# Altium PCB ATGuard Simple V52.PcbDoc
Units mm, origin at the board's own origin, x right, y up, seen from the top; angles counter-clockwise.
Board outline 99.5 x 18.8 mm, 2 copper layers (Top Layer, Bottom Layer), stack 1.071 mm thick; 87 components, 49 nets, 274 pads, 88 vias.
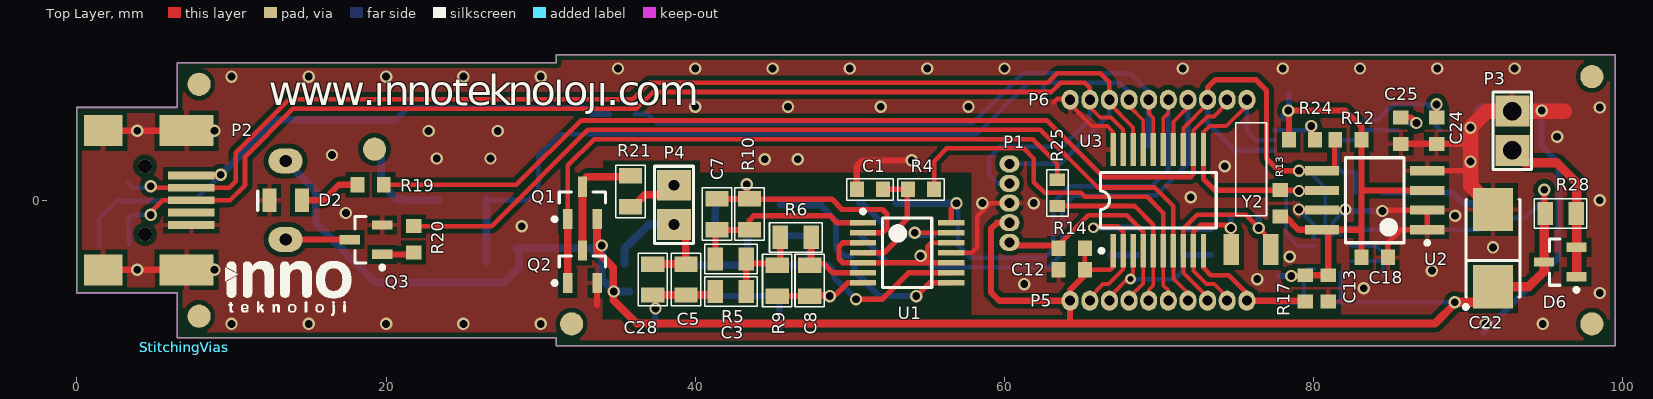
[diagram p0: Top Layer view]
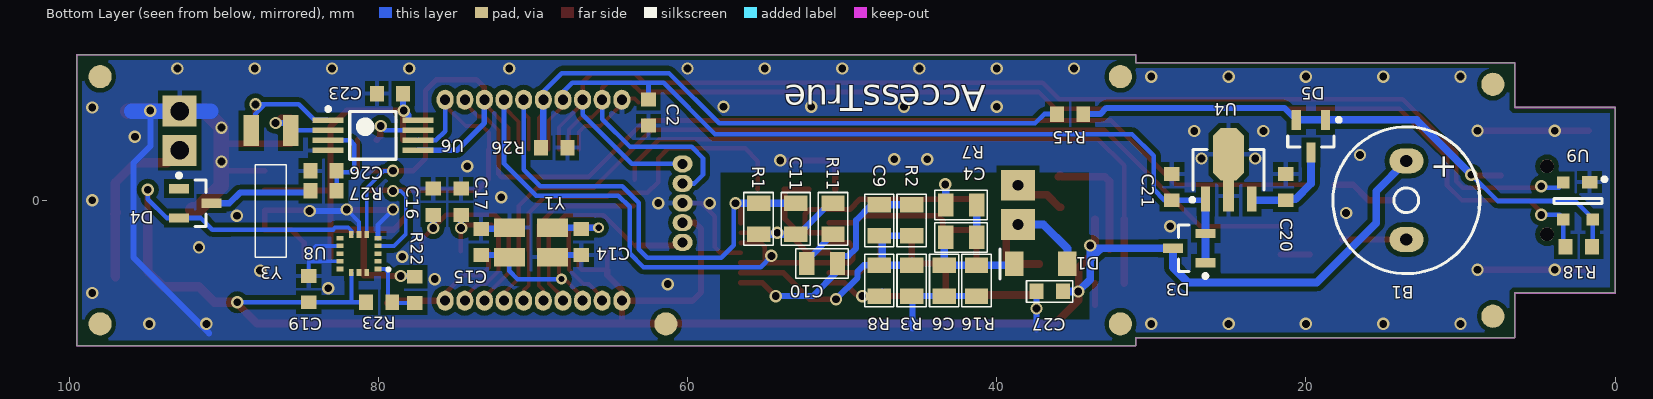
[diagram p1: Bottom Layer view, seen from below]
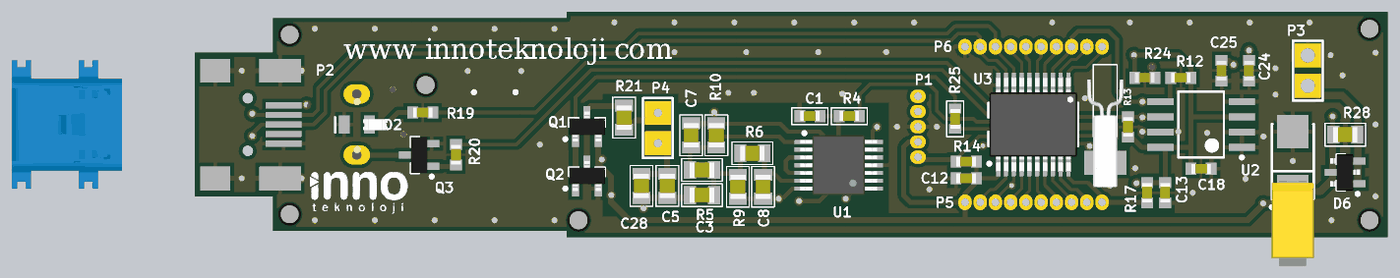
[diagram p2: 3D render of the assembled board from above, using the file's embedded part models]
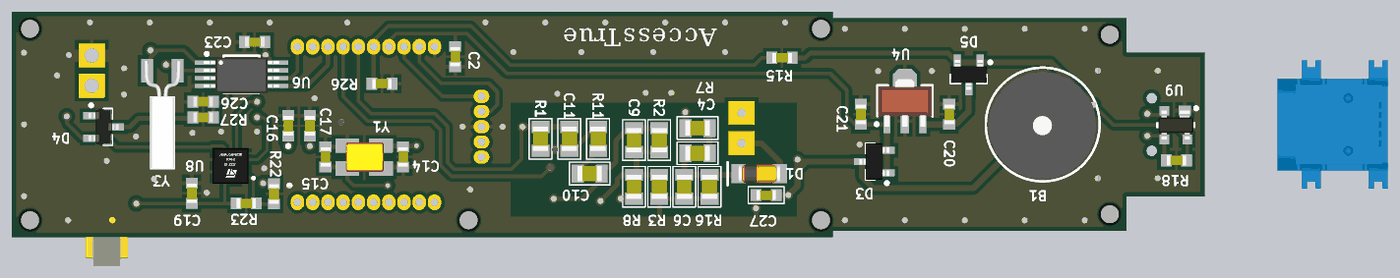
[diagram p3: 3D render of the assembled board from below, using the file's embedded part models]

## Layer stack, top to bottom
Top Layer: signal copper 0.0356
Dielectric: core 1, FR-4, Dk 4.8
Bottom Layer: signal copper 0.0356

## Board outline
31,-8.9 31,-9.4 99.5,-9.4 99.5,9.4 31,9.4 31,8.9 6.5,8.9 6.5,6 0,6 0,-6 6.5,-6 6.5,-8.9

## Design rules (kind name [scope] priority, off if disabled: settings)
Clearance Clearance_1 [InNamedPolygon('Direct Connect 8') Or  InNamedPolygon('Direct Connect 1') Or  InNamedPolygon('Direct Connect 11') Or  InNamedPolygon('Direct Connect 4') Or  InNamedPolygon('Direct Connect 5') Or  InNamedPolygon('Direct Connect 7') Or  InNamedPolygon('Direct Connect 10') Or  InNamedPolygon('Direct Connect 9') Or  InNamedPolygon('Direct Connect 2') Or  InNamedPolygon('Direct Connect 6') Or  InNamedPolygon('Direct Connect 3')] p1: gap=0.25
Clearance StitchingVias-Internal [InComponent('StitchingVias') vs InComponent('StitchingVias')] p2: gap=0.3 // Clearance between Stitching Vias
Clearance StitchingVias-Electrical [InComponent('StitchingVias') vs OnSignal] p3: gap=0.3 // Clearance between Stitching Vias and Electrical Objects
Clearance StitchingVias-Board [InComponent('StitchingVias') vs OnLayer('Keep-Out Layer')] p4: gap=0.3 // Clearance between Stitching Vias and Board Outline
Clearance [All] p5: gap=0.3
ComponentClearance StitchingVias-Comp [InComponent('StitchingVias')] p1: gap=0 collisioncheckmode=3 verticalgap=0 showdistances=FALSE // Clearance between "StitchingVias" Component and other Components
ComponentClearance [All] p2: gap=0.254 collisioncheckmode=3 verticalgap=0.254 showdistances=FALSE
HoleSize [All] p1: absolutevalues=TRUE maxlimit=2.54 minlimit=0.2 maxpercent=80.000 minpercent=20.000
HoleToHoleClearance [All] p1: gap=0.1 allowstackedmicrovias=TRUE
MinimumSolderMaskSliver [All] p1: minsoldermaskwidth=0
NetAntennae [All] p1: netantennaetolerance=0.1
PlaneClearance [All] p1: clearance=0.25
PlaneConnect StitchingVias-Plane [InComponent('StitchingVias')] p1: planeconnectstyle=Direct reliefexpansion=0.508 reliefentries=4 reliefconductorwidth=0.254 reliefairgap=0.254 // Power plane connect style rule for Stitching Vias
PlaneConnect [All] p2: planeconnectstyle=Relief reliefexpansion=0.508 reliefentries=4 reliefconductorwidth=0.254 reliefairgap=0.254
PolygonConnect PolygonConnect_3 [All vs IsNamedPolygon('Direct Connect 8') Or  IsNamedPolygon('Direct Connect 1') Or  IsNamedPolygon('Direct Connect 11') Or  IsNamedPolygon('Direct Connect 4') Or  IsNamedPolygon('Direct Connect 5') Or  IsNamedPolygon('Direct Connect 7') Or  IsNamedPolygon('Direct Connect 10') Or  IsNamedPolygon('Direct Connect 9') Or  IsNamedPolygon('Direct Connect 2') Or  IsNamedPolygon('Direct Connect 6') Or  IsNamedPolygon('Direct Connect 3')] p1: connectstyle=Direct reliefconductorwidth=0.254 reliefentries=4 polygonreliefangle="90 Angle"
PolygonConnect PolygonConnect_2 [All vs IsNamedPolygon('Top VBAT') Or  IsNamedPolygon('Bottom VBAT') Or  IsNamedPolygon('Top VBAT')] p2: connectstyle=Direct reliefconductorwidth=0.254 reliefentries=4 polygonreliefangle="90 Angle"
PolygonConnect StitchingVias-Poly [InComponent('StitchingVias')] p3: connectstyle=Direct reliefconductorwidth=0.254 reliefentries=4 polygonreliefangle="90 Angle" // Polygon connect style rule for Stitching Vias
PolygonConnect PolygonConnect_1 [All vs IsNamedPolygon('Top Full')] p4: connectstyle=Relief reliefconductorwidth=0.254 reliefentries=4 polygonreliefangle="90 Angle"
PolygonConnect [All] p5: connectstyle=Relief reliefconductorwidth=0.3 reliefentries=4 polygonreliefangle="90 Angle"
RoutingVias StitchingVias-ViaStyle [InComponent('StitchingVias')] p1: holewidth=0.4 width=0.6 viastyle="Through Hole" minholewidth=0.3 minwidth=0.5 maxholewidth=0.6 maxwidth=1 // Via style rule for Stitching Vias
RoutingVias [All] p2: holewidth=0.4 width=0.7 viastyle="Through Hole" minholewidth=0.4 minwidth=0.7 maxholewidth=0.711 maxwidth=1.27
SilkToSilkClearance [All] p1: silktosilkclearance=0
SilkscreenOverComponentPads [All] p1: minsilkscreentomaskgap=0
SolderMaskExpansion [All] p1: expansion=0
TestPointUsage [All] p1: valid=0 allowmultiple=FALSE
Testpoint [All] p1: side=15 testpointundercomponent=TRUE minsize=1.016 maxsize=2.54 preferedsize=1.524 minholesize=0 maxholesize=1.016 preferedholesize=0.813 testpointgrid=0.025 style=1023 order=0-112345678
Width [All] p1: maxlimit=1 minlimit=0.2 preferedwidth=0.3
15 further rules are at their usual default settings.

## Classes and differential pairs
component class RF_125KHz: C3 C4 C5 C6 C7 C8 C9 C10 C11 C27 C28 D1 P4 Q1 Q2 R1 R2 R3 R5 R6 R7 R8 R9 R10 R11 R16 R21 R25 U1
component class "AT Guard Simple RTC": C23 C24 C25 C26 D4 R24 R27 U6 Y3
component class "AT Guard Simple Power": C20 C21 C22 D3 D5 D6 P3 R28 U4
component class "AT Guard Simple Mems": C19 R22 R23 U8
component class "AT Guard Simple Memory": C18 U2
component class "AT Guard Simple Main": B1 C1 C2 C12 C13 C14 C15 C16 C17 D2 P1 P2 P5 P6 Q3 R4 R12 R13 R14 R15 R17 R18 R19 R20 R26 U3 U9 Y1 Y2

## Components (designator, comment, footprint, x,y, rotation, side; value= is the part's Value field where it differs from the comment)
B1 "Buzzer 5V r=12mm, h=7.5 mm" "Buzzer 9x5.5 mm" 13.5,0 r270 bottom
C1 "Cap" 3-0603_N#1 51.3,0.7 r0 top
C2 "Cap" 3-0603_L 62.525,5.675 r90 bottom
C3 "Cap" 6-0805_N 42.3,-5.9 r0 top
C4 "Cap" 6-0805_N 42.3,-2.4 r0 bottom
C5 "Cap" 6-0805_N 39.41,-5.13 r270 top
C6 "Cap" 6-0805_N 43.4,-5.2 r270 bottom
C7 "Cap" 6-0805_N 41.4,-0.9 r270 top
C8 "Cap" 6-0805_N 47.4,-5.2 r270 top
C9 "Cap" 6-0805_N 47.6,-1.3 r90 bottom
C10 "Cap" 6-0805_N 51.3,-4.1 r0 bottom
C11 "Cap" 6-0805_N 53,-1.2 r90 bottom
C12 "Cap" 3-0603_L 64.35,-4.5 r0 top
C13 "Cap" 3-0603_L 80.95,-5.7 r90 top
C14 "Cap" 3-0603_L 66.875,-2.7 r90 bottom
C15 "Cap" 3-0603_L 73.35,-2.7 r270 bottom
C16 "Cap" 3-0603_L 76.45,-0.1 r270 bottom
C17 "Cap" 3-0603_L 74.65,-0.1 r270 bottom
C18 "Cap" 3-0603_L 83.95,-3.7 r180 top
C19 "Cap" 3-0603_L 84.5,-5.75 r90 bottom
C20 "Cap" 3-0603_L 21.3,0.85 r270 bottom
C21 "Cap" 3-0603_L 28.675,0.85 r270 bottom
C22 "CAP-Tantal" C 91.6,-3.1 r90 top
C23 "Cap" 3-0603_L 79.25,6.9 r0 bottom
C24 "Cap" 3-0603_L 87.95,4.5 r90 top
C25 "Cap" 3-0603_L 85.65,4.5 r90 top
C26 "Cap" 3-0603_L 83.55,1.9 r180 bottom
C27 "Cap" 3-0603_N#1 36.575,-5.9 r180 bottom
C28 "Cap" 6-0805_N 37.25,-5.13 r270 top
D1 "LL4148" "DL-35 - S" 37.15,-4.1 r0 bottom
D2 "LED" "6-0805 - LED" 13.5,0 r180 top
D3 "BAT54C" SOT23_N 27.55,-3.1 r0 bottom
D4 "BAT54C" SOT23_N 91.85,-0.2 r180 bottom
D5 "BAT54C" SOT23_N 19.675,4.15 r270 bottom
D6 "BAT54C" SOT23_N 95.95,-4 r180 top
P1 "Header 5pin" "Header 1.27mm 5P" 60.325,-2.725 r90 top
P2 "USB Mini B" "USB Mini B Female_N 2" 4.4,0 r270 top
P3 "Header 2H" "HDR1X2H-180 derece"#1 92.85,4.5 r90 top
P4 "Header 2H" "HDR1X2H-180 derece"#2 38.625,-0.3 r90 top
P5 "Header 10" "Header 1.27mm 10P" 64.25,-6.5 r0 top
P6 "Header 10" "Header 1.27mm 10P" 64.25,6.5 r0 top
Q1 "BSS84" SOT23_N 32.7,-0.175 r90 top
Q2 "2N7002" SOT23_N 32.7,-4.3 r90 top
Q3 "BC817-40" SOT23_N 18.7,-2.55 r180 top
R1 "Res1" 6-0805_N 55.4,-1.2 r90 bottom
R2 "Res1" 6-0805_N 45.5,-1.3 r270 bottom
R3 "Res1" 6-0805_N 45.5,-5.2 r270 bottom
R4 "Res1" 3-0603_N#1 54.6,0.7 r180 top
R5 "Res1" 6-0805_N 42.3,-3.8 r180 top
R6 "Res1" 6-0805_N 46.5,-2.4 r180 top
R7 "Res1" 6-0805_N 42.3,-0.3 r180 bottom
R8 "Res1" 6-0805_N 47.6,-5.2 r270 bottom
R9 "Res1" 6-0805_N 45.3,-5.2 r90 top
R10 "Res1" 6-0805_N 43.5,-0.9 r90 top
R11 "Res1" 6-0805_N 50.6,-1.2 r90 bottom
R12 "Res1" 3-0603_L 82.25,3.9 r0 top
R13 "Res1" 3-0603_L 77.85,-0.2 r270 top
R14 "Res1" 3-0603_L 64.35,-3.1 r0 top
R15 "Res1" 3-0603_L 35.25,5.575 r180 bottom
R16 "Res1" 6-0805_N 41.3,-5.2 r90 bottom
R17 "Res1" 3-0603_L 79.45,-5.7 r90 top
R18 "Res1" 3-0603_L 2.35,-3 r180 bottom
R19 "Res1" 3-0603_L 19,1 r0 top
R20 "Res1" 3-0603_L 21.775,-2.525 r90 top
R21 "Res1" 6-0805_N 35.8,0.575 r270 top
R22 "Res1" 3-0603_L 77.65,-5.8 r270 bottom
R23 "Res1" 3-0603_L 79.95,-6.6 r180 bottom
R24 "Res1" 3-0603_L 79.25,3.9 r0 top
R25 "Res1" 3-0603_N#2 63.425,0.475 r90 top
R26 "Res1" 3-0603_L 68.625,3.4 r0 bottom
R27 "Res1" 3-0603_L 83.55,0.6 r180 bottom
R28 "Res1" 6-0805_N 95.975,-0.85 r180 top
StitchingVias "Component That Holds Stitching Vias" ? 6.95,-9.5 r0 top locked
StitchingVias "Component That Holds Stitching Vias" ? 6.95,-9.5 r0 top locked
StitchingVias "Component That Holds Stitching Vias" ? 6.95,-9.5 r0 top locked
StitchingVias "Component That Holds Stitching Vias" ? 6.95,-9.5 r0 top locked
StitchingVias "Component That Holds Stitching Vias" ? 6.95,-9.5 r0 top locked
U1 "#NAME?" TSSOP-14N 53.7,-3.4 r0 top
U2 "24FC1025-I/SM" SOIJ-SM8_N 83.95,0 r180 top
U3 "PIC18LF14K50-I/SS" SSOP-20 69.95,0 r0 top
U4 "78L33ABUTR" SOT89M 25,1.975 r90 bottom
U6 "MCP79402" TSSOP-ST8_M 80.35,4.2 r180 bottom
U8 "LIS3DH" "LGA 16" 81.25,-3.45 r0 bottom
U9 "PRTR5V0U2X" SOT-143B 2.4,-0.05 r90 bottom
Y1 "Crystal Oscillator" "4x2.5mm & 3.2x2.5 mm SMD CRYSTAL - duplicate" 70.125,-2.725 r0 bottom
Y2 "XTAL_SMT" "32768 SMT 2.1x6.2mm Crystal" 75.95,-3.2 r180 top
Y3 "XTAL_SMT" "32768 SMT 2.1x6.2mm Crystal" 86.95,4.5 r180 bottom

## Footprints (in the part's own frame and the unit in brackets; to place one, negate y for a bottom-side part, rotate by r counter-clockwise, add the part's x,y. Pads: shape width x height; smd on the part's side, far side on the other; paste and mask are expansions set on the pad)
3-0603_L [mm] "Chip Resistor; Body 1.6 x 0.9 mm (LxW typ)"
  rect 0.9x1 smd: 1(-0.85,0) 2(0.85,0)
  body extent -0.81,-0.41 0.81,0.41, height 0.46
3-0603_N#1 [mm] "Chip Resistor; Body 1.6 x 0.9 mm (LxW typ)"
  rect 0.9x1 smd: 1(-0.85,0) 2(0.85,0)
  silkscreen extent -1.5,-0.7 1.5,0.7, body extent -0.81,-0.41 0.81,0.41, height 0.46
3-0603_N#2 [mm] "Chip Resistor; Body 1.6 x 0.9 mm (LxW typ)"
  rect 0.8x1 smd: 1(-0.85,0) 2(0.85,0)
  silkscreen extent -1.5,-0.7 1.5,0.7, body extent -0.81,-0.41 0.81,0.41, height 0.46
"4x2.5mm & 3.2x2.5 mm SMD CRYSTAL - duplicate" [mm] "4x2.5mm & 3.2x2.5 mm SMD CRYSTAL"
  rect 2x1.2 smd: 1(-1.4,-0.95) 2(1.4,-0.95) 3(1.4,0.95) 4(-1.4,0.95)
  body extent -1.66,-1.24 1.54,1.26, height 0.77
"6-0805 - LED" [mm] "Chip LED"
  rect 0.9x1.5 smd: 1(-1.05,0) 2(1.05,0)
  silkscreen extent 1.8,-0.6 1.8,0.65, body extent -1.03,-0.45 1.03,0.46, height 0.85
6-0805_N [mm] "Chip Resistor; Body 2 x 1.2 mm (LxW typ)"
  rect 1x1.5 smd: 1(-1,0) 2(1,0)
  silkscreen extent -1.7,-0.95 1.7,0.95, body extent -1.01,-0.63 1.01,0.64, height 0.61
"32768 SMT 2.1x6.2mm Crystal" [mm] "32768 SMT 2.1x6.2mm Crystal"
  rect 1x2 smd: 1(-1.27,0) 2(1.27,0)
  silkscreen extent -1,-8.2 1,-2.2, body extent -1.53,-8.17 1.53,0.81, height 2
"Buzzer 9x5.5 mm" [mm]
  oval 1.6x2.2 hole 0.8: 1(-2.54,0) 2(2.54,0)
  silkscreen extent -4.75,-4.75 4.75,4.75, body extent -4.41,-4.52 4.59,4.48, height 4.5
C [mm] "Capacitor, SM Tantalum; Body 6.0 x 3.2 mm (LxW typ)"
  rect 2.8x2.6 smd: 1(-2.5,0) 2(2.5,0)
  silkscreen extent -3.92,-1.75 3.15,1.87, body extent -3.8,-1.75 3.79,1.76, height 2.79
"DL-35 - S" [mm]
  rect 1.2x1.6 smd: 1(-1.725,0) 2(1.725,0)
  silkscreen extent 2.64,-0.95 2.64,0.98, body extent -1.76,-0.75 1.74,0.75, height 1.5
"HDR1X2H-180 derece"#1 [mm] "Connector; Header; 2 Position; Right Angle"
  rect 2x2.2 hole 1.2: 1(-1.27,0) 2(1.27,0)
  silkscreen extent -2.5,-1.25 2.5,1.25
"HDR1X2H-180 derece"#2 [mm] "Connector; Header; 2 Position; Right Angle"
  rect 2x2.2 hole 0.7: 1(-1.27,0) 2(1.27,0)
  silkscreen extent -2.5,-1.25 2.5,1.25
"Header 1.27mm 5P" [mm] "5 pin header 1.27mm"
  oval 1.1x1.3 hole 0.65: 1(0,0) 2(1.27,0) 3(2.54,0) 4(3.81,0) 5(5.08,0)
"Header 1.27mm 10P" [mm] "10 pin header 1.27mm"
  oval 1.1x1.3 hole 0.65: 1(0,0) 2(1.27,0) 3(2.54,0) 4(3.81,0) 5(5.08,0) 6(6.35,0) 7(7.62,0) 8(8.89,0) 9(10.16,0) 10(11.43,0)
"LGA 16" [mm] "LGA 16"
  rect 0.45x0.3 smd: 1(-1.225,1) 2(-1.225,0.5) 3(-1.225,0) 4(-1.225,-0.5) 5(-1.225,-1) 9(1.225,-1) 10(1.225,-0.5) 11(1.225,0) 12(1.225,0.5) 13(1.225,1)
  rect 0.3x0.45 smd: 6(-0.5,-1.225) 7(0,-1.225) 8(0.5,-1.225) 14(0.5,1.225) 15(0,1.225) 16(-0.5,1.225)
  silkscreen extent -2,0.93 -1.8,1.12, body extent -1.5,-1.5 1.5,1.5, height 1.01
SOIJ-SM8_N [mm] "SOP, 8-Leads, Body 5.2x5.2mm, Pitch 1.27mm, IPC Medium Density"
  rect 2.2x0.6 smd: 1(-3.4,1.905) 2(-3.4,0.635) 3(-3.4,-0.635) 4(-3.4,-1.905) 5(3.4,-1.905) 6(3.4,-0.635) 7(3.4,0.635) 8(3.4,1.905)
  silkscreen extent -3.52,-2.75 1.9,2.88, body extent -2.73,-2.75 2.73,2.75, height 2.04
SOT23_N [mm] "SOT23, 3-Leads, Body 2.9x1.3mm, Pitch 0.95mm, Lead Span 2.3mm, IPC Medium Density"
  rect 1.3x0.6 smd: 1(-1.05,0.95) 2(-1.05,-0.95) 3(1.05,0)
  silkscreen extent -1.17,-1.5 0.7,1.92, body extent -1.25,-1.5 1.25,1.5, height 1.05
SOT89M [mm] "SOT89, 3-Leads, Body 4.5x2.4 mm, Pitch 1.5mm, Lead Span 4.1mm, IPC Low Density"
  rect 1.6x0.6 smd: 1(-1.9,1.5) 3(-1.9,-1.5)
  rect 2x0.7 smd: 2(-1.7,0)
  oct 3.4x2 smd: 2(1,0)
  silkscreen extent -2.07,-2.3 1.3,2.48, body extent -2.18,-2.3 1.82,2.3, height 1.6
SOT-143B [mm] "SOT143B"
  rect 0.8x1 smd: 1(1.22,-0.75)
  rect 0.8x0.8 smd: 2(1.2,0.95) 3(-1.2,0.95) 4(-1.2,-0.95)
  silkscreen extent -0.15,-1.83 1.53,1.55, body extent -1.21,-1.46 1.21,1.46, height 1
SSOP-20 [mm]
  rect 0.35x2.15 smd: 1(-2.925,-3.275) 2(-2.275,-3.275) 3(-1.625,-3.275) 4(-0.975,-3.275) 5(-0.325,-3.275) 6(0.325,-3.275) 7(0.975,-3.275) 8(1.625,-3.275) 9(2.275,-3.275) 10(2.925,-3.275) 11(2.925,3.275) 12(2.275,3.275) 13(1.625,3.275) 14(0.975,3.275) 15(0.325,3.275) 16(-0.325,3.275) 17(-0.975,3.275) 18(-1.625,3.275) 19(-2.275,3.275) 20(-2.925,3.275)
  silkscreen extent -3.8,-3.4 3.75,1.8, body extent -3.66,-3.95 3.66,3.95, height 1.78
TSSOP-14N [mm] "TSOP, 14-Leads, Body 4.5x4.3mm (max), Pitch 0.65mm, IPC Medium Density"
  rect 1.7x0.35 smd: 1(-2.85,1.95) 2(-2.85,1.3) 3(-2.85,0.65) 4(-2.85,0) 5(-2.85,-0.65) 6(-2.85,-1.3) 7(-2.85,-1.95) 8(2.85,-1.95) 9(2.85,-1.3) 10(2.85,-0.65) 11(2.85,0) 12(2.85,0.65) 13(2.85,1.3) 14(2.85,1.95)
  silkscreen extent -2.97,-2.25 1.6,2.8, body extent -3.2,-2.5 3.2,2.5, height 1.1
TSSOP-ST8_M [mm] "TSOP, 8-Leads, Body 3x4.4mm, Pitch 0.65mm, IPC Low Density"
  rect 2x0.35 smd: 1(-2.9,0.975) 2(-2.9,0.325) 3(-2.9,-0.325) 4(-2.9,-0.975) 5(2.9,-0.975) 6(2.9,-0.325) 7(2.9,0.325) 8(2.9,0.975)
  silkscreen extent -3.03,-1.55 1.5,1.82, body extent -3.14,-1.58 3.14,1.42, height 1.09
"USB Mini B Female_N 2" [mm] "USB Mini B Female Connector"
  round 0.9 hole 0.9 unplated: 0(-2.2,0) 0(2.2,0)
  rect 0.5x3 smd: 1(-1.6,3) 2(-0.8,3) 3(0,3) 4(0.8,3) 5(1.6,3)
  rect 2x3.5 smd: 6(-4.5,2.7) 6(4.5,2.7)
  rect 2x2.5 smd: 6(-4.5,-2.7) 6(4.5,-2.7)
  body extent -5.35,-5.89 5.35,3.3, height 3.95
? [mm]

## Part data
B1: library part Buzzer_
C1 C2 C3 C4 C5 C6 C7 C8 C9 C10 C11 C12 C13 C14 C15 C16 C17 C18 C19 C20 C21 C23 C24 C25 C26 C27 C28: "Capacitor"
C22: "Tantamount Military, Surface Mount MIL-PRF-55365/8 Qualified Solid Tantalum Chip Capacitor: 6.8uF, 20% Tolerance, 6 WVDC @ +85°C, Surge = 8V"
D1: "1 Amp General Purpose Rectifier"
D2: "Typical INFRARED GaAs LED"
D3 D4 D5 D6: "2x200 mA Shottky Rectifier"
P1: library part "Header 5 pin", "Header 5-Pin"
P3 P4: "Header, 2-Pin, Right Angle"
P5 P6: "Header, 10-Pin"
Q1: "P-channel Enhancement Mode Vertical D-MOSFET"
Q2: "N-channel Enhancement Mode Field-effect Transistor"
Q3: "NPN General-purpose Transistor"
R1 R2 R3 R4 R5 R6 R7 R8 R9 R10 R11 R12 R13 R14 R15 R16 R17 R18 R19 R20 R21 R22 R23 R24 R25 R26 R27 R28: "Resistor"
U1: library part LMV324IPWR, "IC OPAMP GP R-R 1MHZ 14TSSOP"
U2: "1 Mbit, 1MHz, 2.5V, I2C Serial EEPROM, 8-Pin SOIC 208mil, Industrial Temperature"
U3: "High Performance, Enhanced FLASH Microcontroller with 10-Bit A/D and nanoWatt Technology, 8K FLASH, 20-Pin SSOP, Standard Volt Range, Industrial Temperature"
U4: "Precision 500mA Regulator"
U6: "MCP79402 RTC,I2C"
U8: "3-axis - ±2g analog output “nano” accelerometer"
U9: "Ultra low capacitance double rail-to-rail ESD protection diode"
Y2 Y3: "Crystal Oscillator"

## Free pads (board coordinates)
  round 1.5 smd mask+0.2: 0(7.9,-7.5) 0(7.9,7.5) 0(19.25,3.3) 0(32,-8) 0(98,-8) 0(98,8)
  round 1.5 smd far side mask+0.2: 0(7.9,-7.5) 0(7.9,7.5) 0(32,-8) 0(32,8) 0(61.4,-8) 0(98,-8) 0(98,8)

## Via types
v1: diameter 0.8, hole 0.5, Top Layer to Bottom Layer, tented both sides, 86 vias
v2: diameter 0.7, hole 0.4, Top Layer to Bottom Layer, tented both sides, 2 vias

## Nets (pads, with @x,y where several pads share a name; then routed paths per layer and width w, separated by ;. In a path a pad name is that pad's centre, name@x,y a point inside that pad or via, vN(x,y) a via of type N, cw(c..) or ccw(c..) an arc to the next point about the centre after c; other vN are vias at no path point)
2: C14.2 P5.2 U3.2 Y1.1 | length 10.7
  Top Layer w0.25: P5.2 65.52,-6.291 66.386,-5.425 66.729,-5.425 67.675,-4.479 U3.2 ; v2(65.75,-1.775) v2@65.85,-1.675
  Top Layer w0.3: v2@65.85,-1.675 67.325,-1.675 67.675,-2.025 U3.2
  Bottom Layer w0.4: v2(65.75,-1.775) Y1.1
3: C15.2 P5.3 U3.3 Y1.3 | length 10.2
  Top Layer w0.25: P5.3 66.79,-6.26 68.325,-4.725 U3.3
  Bottom Layer w0.3: v2@68.25,-5.1 v2(68.15,-5.1) 71,-5.1 71.525,-4.575 Y1.3
  Bottom Layer w0.4: Y1.3@71.65,-3.55 C15.2
4: P1.1 P5.4 R14.1 U3.4 | length 14.5
  Top Layer w0.25: P5.4 68.06,-6.29 68.975,-5.375 U3.4
  Top Layer w0.3: R14.1@63.619,-2.775 65.419,-0.975 67.911,-0.975 68.975,-2.039 U3.4
  Top Layer w0.4: P1.1 60.525,-2.925 R14.1@63.325,-2.925
5: P5.5 R25.1 U3.5 | length 11.7
  Top Layer w0.25: P5.5@69.35,-6.5 P5.5 69.33,-5.82 69.625,-5.525 U3.5
  Top Layer w0.3: R25.1@63.475,-0.375 68.425,-0.375 69.625,-1.575 U3.5
6: P5.6 R4.1 U3.6 | length 25.5
  Top Layer w0.25: U3.6 70.275,-5.525 70.6,-5.85 P5.6
  Top Layer w0.3: R4.1@55.5,0.75 R4.1 55.45,2.525 56.28,3.355 61.245,3.355 61.9,2.7 61.9,1.175 62.6,0.475 64.95,0.475 65.2,0.225 69.225,0.225 70.275,-0.825 U3.6
7: P5.7 R20.2 U3.7 | length 60.3
  Top Layer w0.25: U3.7 70.925,-5.075 71.87,-6.02 P5.7
  Top Layer w0.3: R20.2 26.825,-1.675 33.055,4.555 62.32,4.555 66.05,0.825 69.725,0.825 70.925,-0.375 U3.7
8: C16.2 P5.8 U3.8 Y2.1 | length 13.6
  Top Layer w0.25: U3.8 71.575,-4.7 73.14,-6.265 P5.8
  Top Layer w0.3: U3.8 71.575,-1.84 72.465,-0.95 75.6,-0.95 77.22,-2.57 Y2.1@77.22,-3.3
  Bottom Layer w0.4: v1(76.45,-1.8) C16.2
9: C17.2 P5.9 U3.9 Y2.2 | length 10.6
  Top Layer w0.25: U3.9 72.225,-4.572 73.078,-5.425 73.575,-5.425 74.41,-6.26 P5.9
  Top Layer w0.3: U3.9 72.225,-2.039 72.664,-1.6 74.35,-1.6 74.68,-1.93 Y2.2@74.68,-3.3
  Bottom Layer w0.4: v1(74.65,-1.8) C17.2@74.65,-1.05
10: P5.10 R17.1 U3.10 | length 8.9
  Top Layer w0.3: U3.10 72.875,-4.375 73.35,-4.85 74.5,-4.85 75.68,-6.03 P5.10
  Top Layer w0.4: P5.10 79.3,-6.5 R17.1@79.45,-6.65
11: P6.10 R13.1 U2.6 U3.11 U6.6 U8.4 | length 24.5
  Top Layer w0.25: U3.11 72.85,3.3 72.85,4.372 73.278,4.8 74.35,4.8 75.68,6.13 P6.10
  Top Layer w0.35: U3.11 72.875,1.375 73.615,0.635 79.05,0.635 U2.6
  Bottom Layer w0.25: v1(79.05,0.6) 78.55,0.6 78.225,0.275 78.225,-2.175 79,-2.95 U8.4
  Bottom Layer w0.3: P6.10 75.68,4.47 76.275,3.875 U6.6 U6.6@77.425,3.9
12: P6.9 R19.2 U3.12 | length 63.2
  Top Layer w0.25: U3.12 72.225,4.525 73.125,5.425 73.544,5.425 74.41,6.291 P6.9@74.41,6.297
  Top Layer w0.3: R19.2 28.425,1 32.58,5.155 62.77,5.155 66.425,1.5 72.05,1.5 72.225,1.675 U3.12 72.225,1.775 ; P6.9@74.41,6.297 P6.9
13: P6.8 R12.1 U2.5 U3.13 U6.5 U8.6 | length 31
  Top Layer w0.25: U3.13 71.575,4.675 73.14,6.24 P6.8 P6.8@73.15,6.51
  Top Layer w0.35: P6.8@73.15,6.51 73.15,7.3 73.65,7.8 76.25,7.8 76.95,7.1 76.95,2.7 77.75,1.9 v1(79.05,1.9) U2.5@80.545,1.9 ; U2.5@81.35,1.9 R12.1@81.35,3.9
  Bottom Layer w0.25: v1(79.05,1.9) 79.65,1.9 80.75,0.8 80.75,-0.1 U8.6
  Bottom Layer w0.35: P6.8 73.14,5.01 74.925,3.225 U6.5
14: P6.7 U1.3 U1.5 U1.10 U1.12 U3.14 | length 42.7
  Top Layer w0.25: U3.14 70.925,5.075 71.87,6.02 P6.7
  Top Layer w0.3: 55,-4.05 55,-3 55.25,-2.75 U1.12 U1.12@56.525,-2.775
  Top Layer w0.35: 49.803,-4.05 49.55,-4.05 ; U1.3 49.55,-2.75 49.3,-3 49.3,-3.8 49.55,-4.05 ; U1.10 55,-4.05 U1.5 49.55,-4.05
  Bottom Layer w0.3: v1(54.575,-3.6) 54.575,-3.625 55.275,-4.325 62.849,-4.325 63.75,-3.424 63.75,-0.424 64.474,0.3 69.8,0.3 71.87,2.37 P6.7
15: C11.2 P6.6 R1.2 U1.14 U3.15 | length 34
  Top Layer w0.25: U3.15 70.275,5.325 70.6,5.65 P6.6
  Top Layer w0.35: U1.14 56.55,-0.55 v1(56.9,-0.2)
  Bottom Layer w0.3: v1(56.9,-0.2) 57,-0.3 57,-2.9 57.825,-3.725 62.6,-3.725 63.15,-3.175 63.15,-0.175 64.225,0.9 69.525,0.9 70.6,1.975 P6.6
  Bottom Layer w0.5: C11.2 R1.2 v1(56.9,-0.2)
16: P6.5 R15.1 R26.2 U3.16 | length 42
  Top Layer w0.25: P6.5 69.35,6.48 69.35,5.6 69.625,5.325 ; U3.16@69.625,3.375 69.625,5.3
  Bottom Layer w0.3: R15.1 36.925,5.575 37.525,4.975 57.95,4.975 61.2,8.225 68.125,8.225 69.33,7.02 P6.5
  Bottom Layer w0.4: R26.2@69.33,3.545 P6.5
18: P1.5 P2.2 P6.3 U3.18 U9.2 | length 81.9
  Top Layer w0.25: P6.3 66.79,6.26 68.325,4.725 U3.18
  Top Layer w0.3: v1(4.775,0.9) 4.875,0.8 9.851,0.8 10.275,1.224 10.275,3.075 13.725,6.525 35.95,6.525 37.025,7.6 62.788,7.6 63.413,8.225 66.2,8.225 66.79,7.635 P6.3
  Bottom Layer w0.3: U9.2@3.275,1.15 3.625,0.8 4.675,0.8 v1(4.775,0.9) ; P1.5 63.605,2.355 66.79,5.54 P6.3
19: P1.4 P2.3 P6.2 R18.1 U3.19 U9.3 | length 85.6
  Top Layer w0.25: P6.2 65.52,6.03 66.2,5.35 66.9,5.35 67.675,4.575 U3.19
  Top Layer w0.3: v1(4.775,-0.95) 4.775,-0.775 5.55,0 9.9,0 10.875,0.975 10.875,2.825 13.975,5.925 36.199,5.925 37.274,7 63.037,7 63.637,7.6 65.2,7.6 65.52,7.28 P6.2
  Bottom Layer w0.3: U9.3@3.275,-1.25 3.575,-0.95 v1(4.775,-0.95) ; R18.1@3.35,-2.85 U9.3 ; P1.4 59.565,1.085 59,1.65 59,2.725 59.725,3.45 63.725,3.45 65.52,5.245 P6.2
+VBAT: B1.1 C12.2 C19.1 C22.1 C27.2 D3.3 D4.2 D6.3 P1.2 P5.1 Q1.2 R14.2 R23.1 R28.2 U3.1 U8.8 U8.14 | length 150.1
  Top Layer w0.3: R14.2@65.2,-3.2 C12.2 ; U3.1 67.025,-4.316 66.841,-4.5 C12.2@65.233,-4.5 ; C12.2 65.2,-4.533 C12.2@65.233,-4.5 ; C12.2 C12.2@65.233,-4.5
  Top Layer w0.4: P1.2 59.52,-1.455 59.125,-1.85 59.125,-5.95 59.675,-6.5 P5.1 ; 64.25,-8.025 64.25,-7.975 P5.1 ; P5.1@64.25,-6.774 P5.1 ; C12.2@65.2,-4.533 65.2,-4.85 64.25,-5.8 P5.1 ; R28.2@94.925,-0.8 v1(94.925,0.675)
  Top Layer w0.5: Q1.2 33.65,-3.3 34.7,-4.35 34.7,-6.45 36.225,-7.975 64.25,-7.975 87.85,-7.975 v1@89.225,-6.6 ; 94.85,-4.65 94.925,-4.575 ; R28.2@94.925,-0.95 94.925,-0.8 R28.2@94.925,-0.675
  Top Layer w0.6: v1@89.225,-6.6 90.6,-6.6 C22.1 93.9,-5.6 94.85,-4.65 ; 94.925,-4.575 R28.2@94.925,-0.95
  Bottom Layer w0.25: 81.75,-6.575 U8.14 ; U8.8 81.75,-1.975 81.95,-1.775 82.8,-1.775 82.925,-1.9
  Bottom Layer w0.3: R23.1 C19.1 v1(89.125,-6.6) ; 82.925,-1.9 89.404,-1.9 ; 89.55,-1.9 89.404,-1.9 ; v1(94.925,0.675) 94.925,0.075 93.7,-1.15 D4.2 91.5,-1.15 90.75,-1.9 89.404,-1.9
  Bottom Layer w0.4: P1.2@60,-1.455 P1.2
  Bottom Layer w0.5: B1.1 15.45,0.59 15.45,-1.475 19.3,-5.325 27.625,-5.325 28.6,-4.35 D3.3 ; D3.3@28.425,-3.1 D3.3 ; 33.275,-3.15 33.875,-3.75 ; v1(33.95,-2.925) v1@33.95,-3.1 ; v1@34.687,-5.863 33.95,-5.125 v1@33.95,-3.1 ; v1(34.725,-5.9) C27.2 ; D3.3 v1@33.95,-3.1
+VBATINPUT: D6.1 D6.2 P3.1 R28.1 | length 11.3
  Top Layer w0.6: P3.1 93.655,2.425 95.725,2.425 97.025,1.125 97.025,-4.925 D6.1 ; R28.1@96.95,-0.8 R28.1@97.05,-0.9
+VCCI2C: C13.2 C18.2 C23.1 R12.2 R13.2 R17.2 R22.1 R24.1 U2.3 U2.8 U6.8 | length 32.6
  Top Layer w0.4: R13.2@78.15,-1.05 79.005,-1.905 U2.8 83.05,-1.905 ; R24.1 78.4,5.65 78.55,5.8 82.05,5.8 83.1,4.75 R12.2 C18.2 ; v1(78.55,-4.9) R17.2@79.4,-4.9 ; R17.2 C13.2 U2.8@80.95,-2 ; 83.11,0.635 U2.3
  Bottom Layer w0.4: R22.1@77.7,-4.9 v1(78.55,-4.9) ; U6.8@78.05,5.3 78.05,5.5 v1(78.35,5.8) ; v1@78.4,5.85 C23.1
+VCCRF: C1.2 R4.2 U1.4 | length 7.7
  Top Layer w0.35: U1.4 52.2,-3.4 53.2,-2.4 53.2,-1.7 53.7,-1.2 R4.2@53.7,0.7 ; C1.2 R4.2@53.7,0.7 ; R4.2 R4.2@53.7,0.7
+VUSB: C2.2 C21.2 D3.1 D3.2 P6.4 U3.17 U4.1 | length 55
  Top Layer w0.25: P6.4 68.06,6.09 68.975,5.175 U3.17
  Top Layer w0.4: P6.4@68.05,6.51 P6.4
  Bottom Layer w0.3: C21.2 29.15,0 29.85,0.7 29.85,2.875 31.25,4.275 58.225,4.275 61.55,7.6 67.45,7.6 68.035,7.015 P6.4@68.06,7.015 ; C2.2 62.525,7.575
  Bottom Layer w0.34: U4.1 26.575,0 C21.2
  Bottom Layer w0.5: D3.1@26.5,-3.975 U4.1 ; P6.4@68.06,6.425 P6.4
GND: C1.1 C2.1 C3.1 C5.2 C6.2 C12.1 C13.1 C14.1 C15.1 C16.1 C17.1 C18.1 C19.2 C20.1 C21.1 C22.2 C23.2 C24.1 C25.1 C26.1 C27.1 C28.2 D2.2 P1.3 P2.5 P2.6 P3.2 P6.1 Q2.2 Q3.2 R3.2 R16.1 R26.1 U1.11 U2.1 U2.2 U2.4 U2.7 U3.20 U4.2 U6.4 U8.5 U8.7 U8.10 U8.12 U9.1 Y1.2 Y1.4 | length 115.9
  Top Layer w0.25: 63.162,6.312 63.425,6.575 63.875,6.575 65.65,4.8 66.65,4.8 67.025,4.425 U3.20
  Top Layer w0.3: U1.11 57.875,-3.4 58.25,-3.025 58.25,-1.025 59.09,-0.185 P1.3
  Top Layer w0.35: v1@84.515,-0.635 U2.2 U2.1 85.645,-1.905 84.8,-2.75 C18.1 ; U2.4 90.055,1.905
  Top Layer w0.4: P2.6@1.7,-4.5 6.6,-4.5 v1(8.9,-4.5) ; P2.6@1.7,4.5 v1(8.9,4.5) ; 33.65,-6.775 Q2.2 ; C28.2 37.425,-6.305 v1(37.425,-7) ; C1.1 50.45,2.225 50.8,2.575 v1@54.05,2.575 ; v1@79.085,-0.635 U2.7 82.015,-0.635 v1(82.05,-0.6) ; C25.1 C24.1 90.1,3.65
  Top Layer w0.5: C28.2 C5.2 C3.1@41.07,-6.13
  Top Layer w1: C22.2@92.025,-0.6 91.7,-0.6 90.15,0.95 v1(90.15,2.5) v1(90.15,4.7) 91.22,5.77 96.225,5.77
  Bottom Layer w0.25: U8.7 81.25,-1.4 v1@81.95,-0.7 ; U8.12 83.379,-3.95 ; U8.10 84.05,-2.95 84.5,-3.4 C19.2 ; 83.7,-3.95 83.379,-3.95 ; 84.5,-3.95 83.379,-3.95
  Bottom Layer w0.3: v1(79.05,-0.6) 80.025,-1.575 U8.5
  Bottom Layer w0.4: 37.425,-8.35 C27.1 ; R16.1 C6.2 R3.2 ; 45.45,-8.3 R3.2@45.45,-6.2 ; C14.1 Y1.4@68.6,-3.55 ; Y1.2@71.6,-1.85 C15.1 C15.1@73.275,-1.775 ; v1@81.95,-0.7 v1(84.45,-0.7) ; 90.95,-8.6 95.85,-3.7 95.85,2.4 94.75,3.5 v1@94.75,5.735
  Bottom Layer w1: 90.85,5.75 95.95,5.75
  other v1: 10,-8 15,-8 20,-8 25,-8 30,-8 91.125,-8 94.825,-8 98.5,-6 83.25,-5.7 61.275,-5.425 76.35,-5.1 87.65,-4.55 3.9,-4.5 78.45,-3.65 91.6,-3.05 28.775,-1.675 89.15,-1 17.4,-0.825 58.575,-0.185 61.9,-0.185 98.5,0 72.05,0.2 74.25,2.2 54,2.575 44.5,2.65 46.625,2.65 23.275,2.7 26.75,2.7 16.5,2.925 95.75,4.1 22.75,4.475 27.225,4.475 3.9,4.5 94.75,5.8 98.5,6 40,6.05 46,6.05 52,6.05 57.675,6.05 10,8 15,8 20,8 25,8 30,8 35,8.525 40,8.525 45,8.525 50,8.525 55,8.525 60,8.525 71.525,8.525 78,8.525 83,8.525 88,8.525 93,8.525
NetB1_2: B1.2 Q3.3 | length 4.1
  Top Layer w0.4: B1.2@13.51,-2.55 Q3.3
NetC3_2: C3.2 R5.1 R6.2 R9.2 | length 5.3
  Top Layer w0.4: C3.2 R5.1 ; R5.1@43.6,-4.1 45.1,-4.1 R9.2@45.2,-4.2 ; R9.2@45.5,-4.2 R6.2@45.5,-2.6
NetC4_1: C4.1 R7.2 | length 2.2
  Bottom Layer w0.4: R7.2@41.28,-0.3 R7.2@41.28,-0.15
  Bottom Layer w0.5: C4.1 R7.2
NetC4_2: C4.2 C6.1 D1.2 R16.2 | length 6.7
  Bottom Layer w0.4: C6.1@43.16,-4.2 C6.1@43.28,-4.08 ; C4.2@43.28,-2.4 C4.2@43.28,-2.05
  Bottom Layer w0.5: D1.2@39.075,-4.2 R16.2 43.16,-4.2 C6.1 43.4,-2.5 C4.2
NetC5_1: C5.1 C28.1 D1.1 P4.1 | length 9.9
  Top Layer w0.4: C5.1@39.38,-4.16 C5.1
  Top Layer w0.5: C28.1 C5.1 39.38,-4.1 39.38,-2.325 P4.1
  Bottom Layer w0.5: D1.1 35.425,-3.125 36.98,-1.57 P4.1
NetC7_1: C7.1 R7.1 R10.2 U1.2 | length 16.3
  Top Layer w0.35: R10.2@43.22,0.07 48.83,0.07 49.5,-0.6 52.1,-0.6 52.4,-0.9 52.4,-1.8 52.1,-2.1 51.897,-2.1 U1.2
  Top Layer w0.4: C7.1@41.32,0.07 R10.2@43.22,0.07 ; R10.2@43.25,0.1 43.325,0.175 43.325,1.075 v1@43.3,1.1
  Bottom Layer w0.4: R7.1@43.28,-0.15 R7.1@43.3,-0.13
  Bottom Layer w0.5: R7.1@43.3,-0.13 v1@43.3,1.05
  other v1: 43.325,1.025
NetC7_2: C7.2 R5.2 R10.1 U1.1 | length 12.2
  Top Layer w0.35: R10.1 43.5,-1.3 43.8,-1 48.7,-1 49.15,-1.45 U1.1
  Top Layer w0.4: R5.2 41.3,-1.95 41.32,-1.93 43.22,-1.93 R10.1@43.37,-1.93
NetC8_1: C8.1 R6.1 U1.6 | length 5.5
  Top Layer w0.35: C8.1@47.1,-4.2 C8.1@47.2,-4.3 ; C8.1@47.1,-4.1 48.3,-4.1 48.9,-4.7 U1.6
  Top Layer w0.4: C8.1@47.5,-4.1 R6.1@47.5,-2.7
NetC8_2: C8.2 R8.2 R9.1 U1.7 | length 9.3
  Top Layer w0.35: C8.2@47.1,-6.1 49.1,-6.1 49.85,-5.35 U1.7
  Top Layer w0.4: R9.1@45.2,-6.2 46.9,-6.2 47.1,-6.4 47.7,-6.4 47.9,-6.2 v1(48.7,-6.2)
  Bottom Layer w0.4: R8.2@47.4,-5.9 R8.2@47.7,-6.2 ; R8.2 R8.2@47.7,-6.2 ; v1(48.7,-6.2) R8.2@47.7,-6.2
NetC9_1: C9.1 R2.2 R3.1 R8.1 U1.9 | length 16.6
  Top Layer w0.35: v1(50.4,-6.4) 52.1,-6.4 53.8,-4.7 U1.9
  Bottom Layer w0.4: R3.1@45.5,-3.9 R3.1@45.8,-4.2 ; R2.2 C9.1@47.4,-2.3 ; R8.1@47.5,-4.2 R8.1@47.6,-4.1 ; R8.1 48.6,-4.2 49,-4.6 49,-5 v1(50.4,-6.4)
  Bottom Layer w0.5: R3.1@45.8,-4.2 R8.1@47.5,-4.2 ; R8.1@47.4,-3.9 C9.1@47.4,-2.3
NetC9_2: C9.2 C10.1 R2.1 U1.8 | length 14.8
  Top Layer w0.35: v1(54.3,-6.2) 55.15,-5.35 U1.8
  Bottom Layer w0.4: C9.2@48.1,-0.3 49.1,-1.3 49.1,-3.1 49.6,-3.6 C10.1@50.1,-3.6 ; C10.1 50.3,-4.6 51.9,-6.2 v1(54.3,-6.2)
  Bottom Layer w0.5: R2.1 C9.2@48.1,-0.3
NetC10_2: C10.2 R11.1 | length 2.6
  Bottom Layer w0.4: R11.1 52.3,-3.9 C10.2
NetC11_1: C11.1 R1.1 R11.2 U1.13 | length 7.8
  Top Layer w0.3: v1(54.2,-2.1) U1.13
  Bottom Layer w0.4: R11.2 50.8,-0.2 52.8,-2.2 C11.1@52.85,-2.2
  Bottom Layer w0.5: C11.1 R1.1
NetC20_2: C20.2 D5.3 U4.3 | length 6.2
  Bottom Layer w0.5: D5.3 19.675,1.075 20.675,0.075 21.225,0.075 C20.2 U4.3@23.425,0
NetC24_2: C24.2 U6.1 Y3.1 | length 8
  Top Layer w0.4: C24.2 v1(87.95,6.2)
  Bottom Layer w0.3: U6.1 83.275,5.2 84.15,5.2 85.15,6.2 87.35,6.2 ; v1(87.95,6.2) 87.35,6.2 ; Y3.1 87.95,4.77 87.95,5.6 87.35,6.2
NetC25_2: C25.2 U6.2 Y3.2 | length 3.8
  Top Layer w0.4: C25.2 86.3,5.35 v1(86.65,5)
  Bottom Layer w0.3: U6.2 Y3.2@85.455,4.525
  Bottom Layer w0.4: Y3.2@86.18,5 v1(86.65,5)
NetC26_2: C26.2 R27.2 U6.3 | length 5.9
  Bottom Layer w0.3: R27.2@82.7,0.5 82.7,1.8 81.85,1.8 81.55,2.1 81.55,3.6 81.825,3.875 U6.3
NetD2_1: D2.1 R19.1 | length 4
  Top Layer w0.4: D2.1 15.95,0 16.95,1 R19.1
NetD4_3: D4.3 R27.1 | length 6.7
  Bottom Layer w0.4: R27.1@84.5,0.5 88.95,0.5 89.65,-0.2 D4.3@90.7,-0.2 ; D4.3@90.8,-0.3 D4.3@90.7,-0.2 ; D4.3 D4.3@90.7,-0.2
NetD5_1: D5.1 D5.2 P2.1 R15.2 R18.2 U9.4 | length 39.8
  Top Layer w0.4: P2.1 9.25,1.6 v1(9.3,1.65)
  Bottom Layer w0.3: U9.4@1.412,-1.212 2.575,-0.05 7.6,-0.05 v1(9.3,1.65) ; R18.2@1.45,-2.95 U9.4
  Bottom Layer w0.4: D5.2 21.4,5.975 32.9,5.975 33.3,5.575 R15.2
  Bottom Layer w0.5: v1(9.3,1.65) 12.85,5.2 D5.1 D5.2
NetP4_2: P4.2 R21.2 | length 2.5
  Top Layer w0.5: R21.2@35.875,-0.45 35.95,-0.45 36.75,0.35 P4.2@38.005,0.35
NetQ1_1: Q1.1 Q2.1 R25.2 | length 41.8
  Top Layer w0.3: Q1.1@31.75,-1.275 Q1.1 Q1.1@31.75,-1.15 ; Q1.1 31.75,2.25 33.455,3.955 61.82,3.955 63.425,2.35 R25.2
  Top Layer w0.5: Q2.1 Q1.1
NetQ1_3: Q1.3 Q2.3 R21.1 | length 7.9
  Top Layer w0.5: Q2.3@32.7,-3.15 32.7,1.225 33,1.525 35.775,1.525 R21.1@35.875,1.625 ; R21.1@35.887,1.637 R21.1@36,1.525
NetQ3_1: Q3.1 R20.1 | length 1.9
  Top Layer w0.4: Q3.1 R20.1@21.65,-3.5
NetR22_2: R22.2 R23.2 U8.1 | length 4.2
  Bottom Layer w0.25: R22.2 R23.2@79.05,-6.65 ; R23.2 79.375,-6.325 79.375,-4.65 79.575,-4.45 U8.1
NetR24_2: R24.2 U6.7 | length 3.5
  Top Layer w0.3: v1(79.85,4.8) v1@79.875,4.775
  Top Layer w0.4: v1@79.875,4.775 79.875,4.125 R24.2
  Bottom Layer w0.3: U6.7 79.575,4.525 v1(79.85,4.8)
pads on no net: D4.1 P2.0 P2.4 U8.2 U8.3 U8.9 U8.11 U8.13 U8.15 U8.16

## Polygon pours and split planes (outlines as drawn)
GND on Top Layer "Bottom Layer-No Net" (solid, pour order 1000): 0,-6 6.5,-6 6.5,-8.9 31,-8.9 31,-9.4 57.9,-9.4 57.9,-7.7 34,-7.7 34,1.825 34,2.575 40.325,2.575 40.325,1.825 45.725,1.825 57.9,1.825 57.9,-9.4 99.5,-9.4 99.5,9.4 31,9.4 31,8.9 6.5,8.9 6.5,6 0,6
GND on Bottom Layer "Bottom Layer-No Net" (solid, pour order 1001): 0,-6 6.5,-6 6.5,-8.9 31,-8.9 31,-9.4 57.9,-9.4 57.9,-7.7 34,-7.7 34,1.825 57.9,1.825 57.9,-9.4 99.5,-9.4 99.5,9.4 31,9.4 31,8.9 6.5,8.9 6.5,6 0,6

## Keep-outs
Keep-Out Layer:
  the board outline again, w0.1

## Silkscreen, mask and mechanical layers (free items; w line width, h text height)
Top Overlay:
  drawing of 17 lines, arcs and shapes, not listed
  text "w" at 12.396,5.5 h3.36
  text "w" at 14.425,5.5 h3.36
  text "w" at 16.455,5.5 h3.36
  text "." at 18.484,5.5 h3.36
  text "i" at 19.202,5.5 h3.36
  text "n" at 19.836,5.5 h3.36
  text "n" at 21.316,5.5 h3.36
  text "o" at 22.795,5.5 h3.36
  text "t" at 24.275,5.5 h3.36
  text "e" at 25.205,5.5 h3.36
  text "k" at 26.6,5.5 h3.36
  text "n" at 27.868,5.5 h3.36
  text "o" at 29.348,5.5 h3.36
  text "l" at 30.827,5.5 h3.36
  text "o" at 31.461,5.5 h3.36
  text "j" at 32.941,5.5 h3.36
  text "i" at 33.617,5.5 h3.36
  text "." at 34.251,5.5 h3.36
  text "c" at 34.97,5.5 h3.36
  text "o" at 36.154,5.5 h3.36
  text "m" at 37.633,5.5 h3.36
Bottom Overlay:
  text "A" at 40.713,8.025 h2.92 r180
  text "c" at 42.25,8.025 h2.92 r180
  text "c" at 43.579,8.025 h2.92 r180
  text "e" at 44.907,8.025 h2.92 r180
  text "s" at 46.236,8.025 h2.92 r180
  text "s" at 47.474,8.025 h2.92 r180
  text "T" at 48.712,8.025 h2.92 r180
  text "r" at 49.942,8.025 h2.92 r180
  text "u" at 50.909,8.025 h2.92 r180
  text "e" at 52.319,8.025 h2.92 r180

## Text inside footprints (layer, text, board x,y; h text height)
B1: Bottom Overlay "+" at 11.732,3.055 h1.52 r90